# Altium PCB bottle.PcbDoc (part 1 of 3)
Units mil, origin at the board's own origin, x right, y up, seen from the top; angles counter-clockwise.
Board outline 2167.23 x 704.79 mil, 4 copper layers (Top Layer, GND, PWR, Bottom Layer), stack 23.756 mil thick; 195 components, 172 nets, 770 pads, 122 vias.
Unrouted connection lines stored in the file: 308.
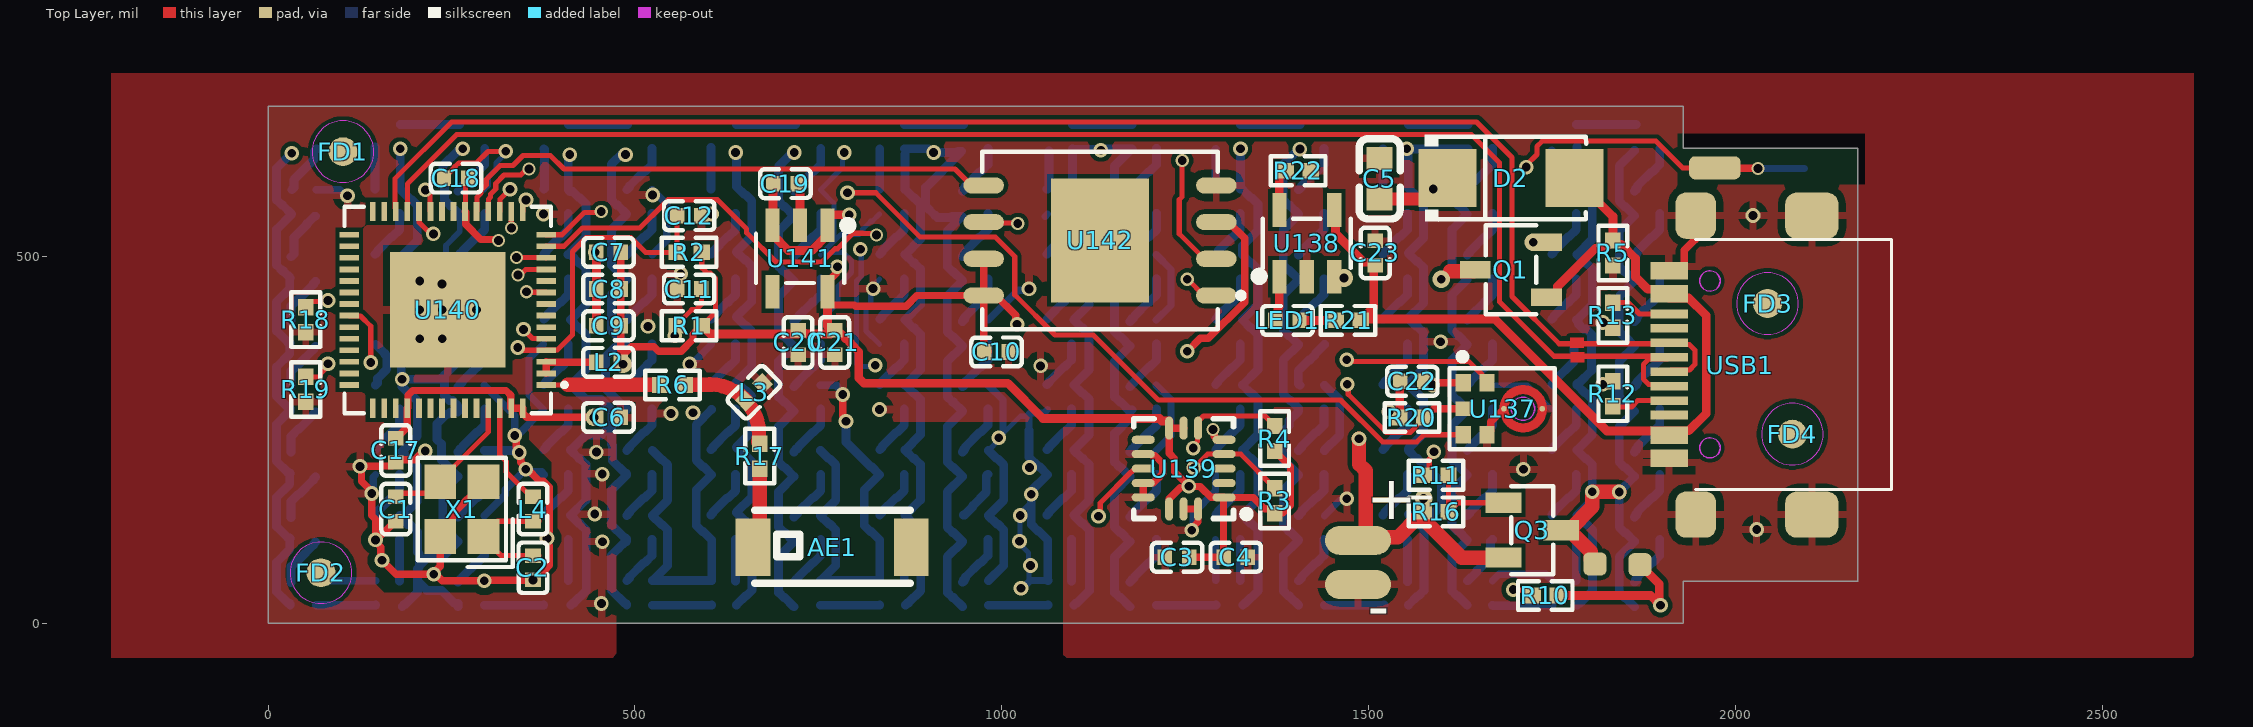
[diagram p0: Top Layer view]
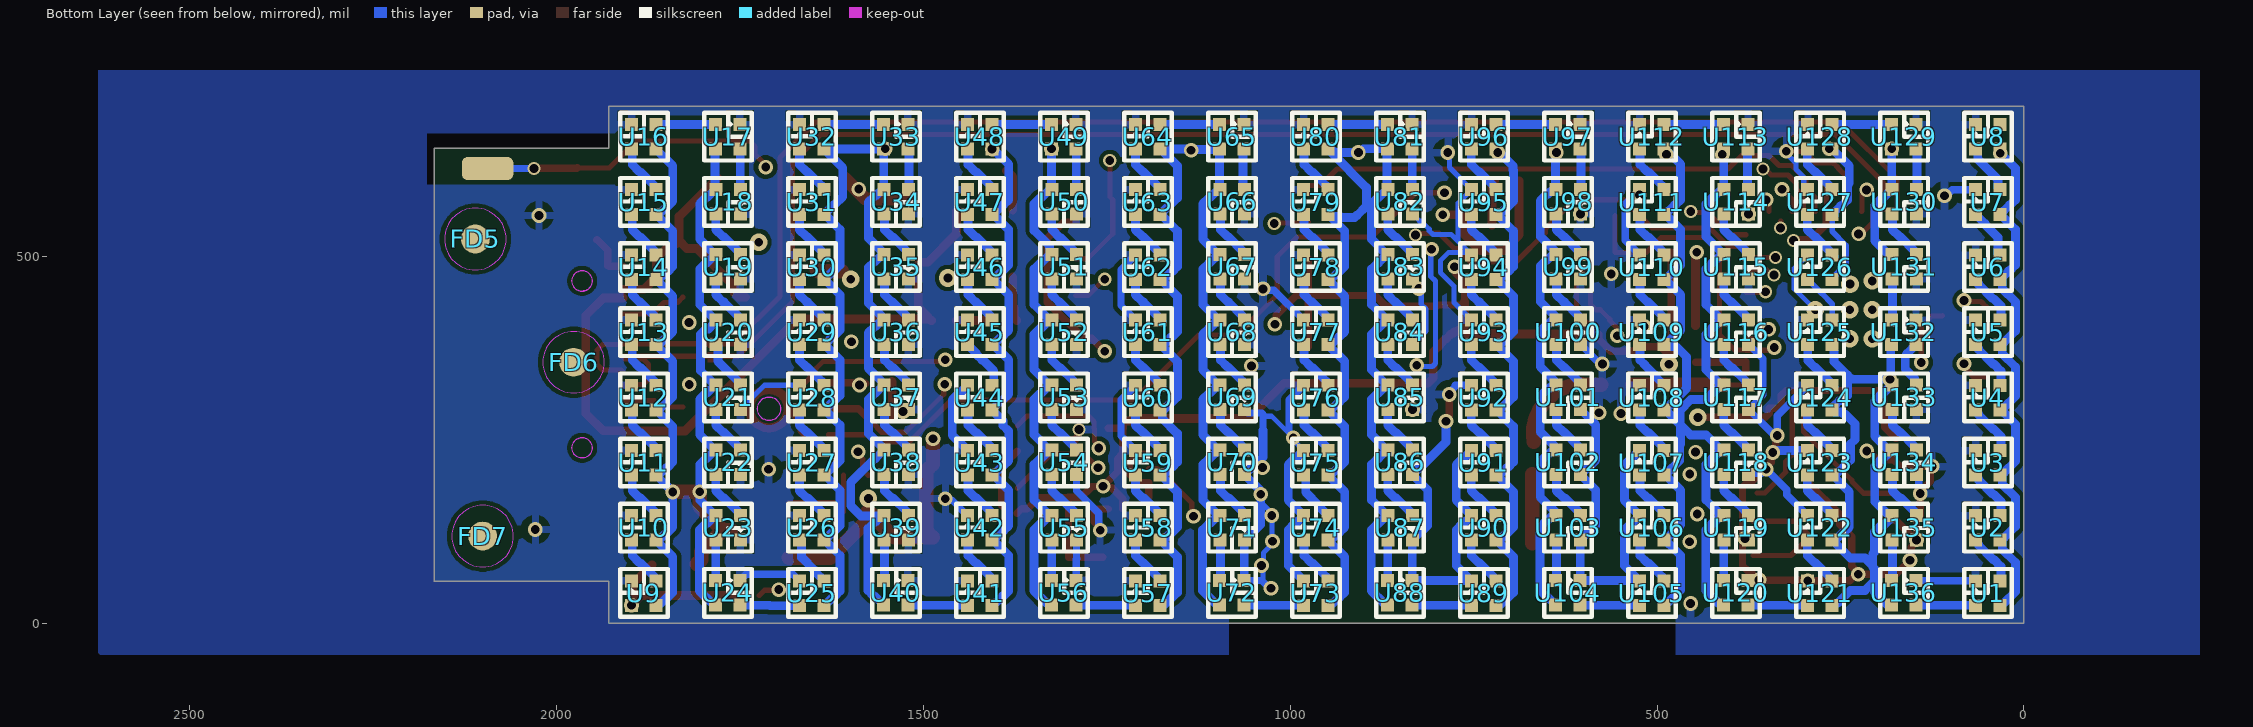
[diagram p1: Bottom Layer view, seen from below]
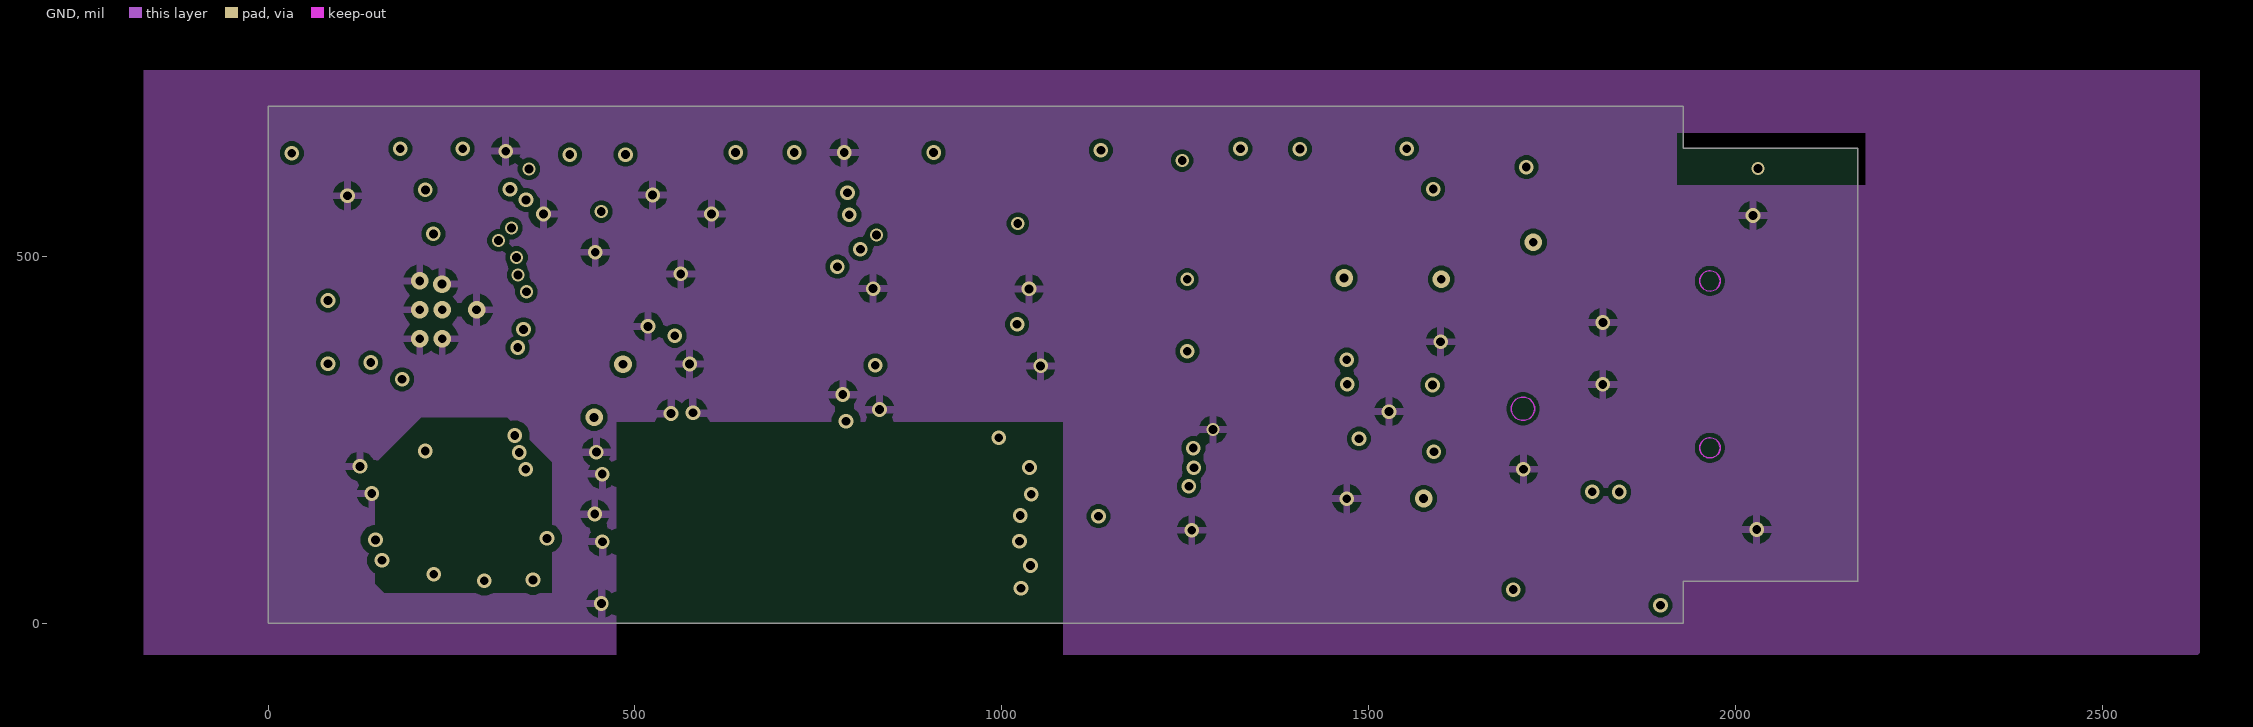
[diagram p2: GND]
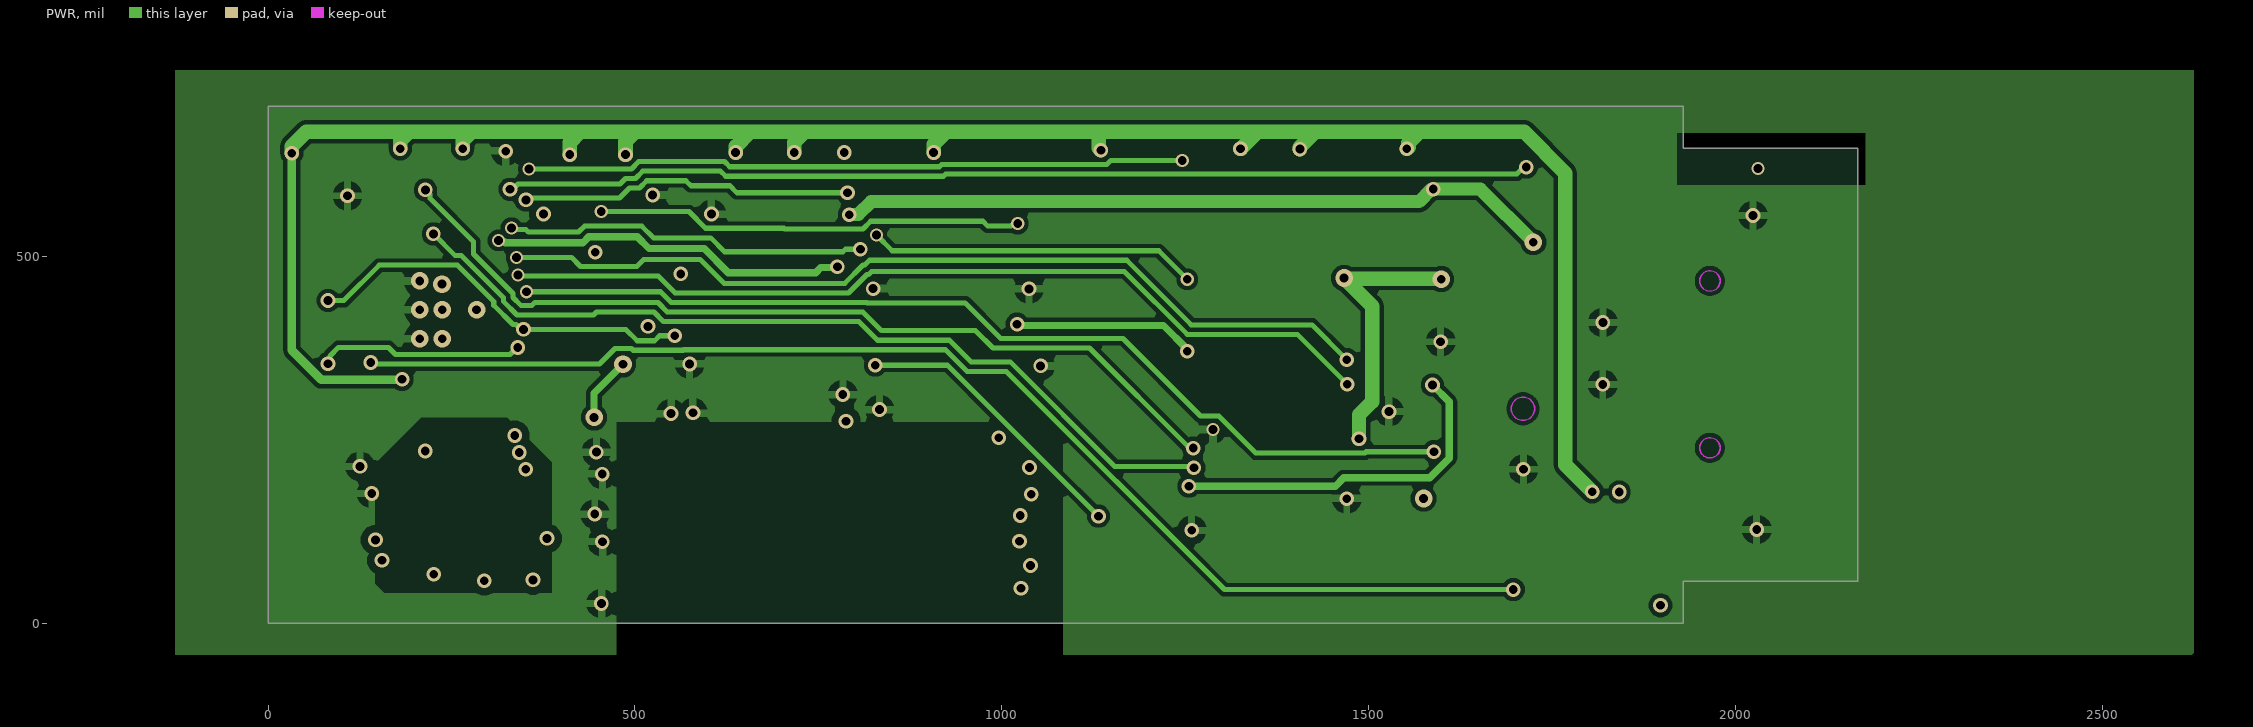
[diagram p3: PWR]

## Layer stack, top to bottom
Top Solder: solder mask 0.4, Solder Resist, Dk 3.5
Top Layer: signal copper 1.4
Dielectric 2: prepreg 2.8, PP-006, Dk 4.1
GND: signal copper 1.378
Dielectric 1: dielectric 12.6, FR-4, Dk 4.8
PWR: signal copper 1.378
Dielectric 3: prepreg 2.8, PP-006, Dk 4.1
Bottom Layer: signal copper 1.4
Bottom Solder: solder mask 0.4, Solder Resist, Dk 3.5

## Board outline
0,0 0,704.79 1929.2,704.79 1929.2,648 2167.23,648 2167.23,57.14 2167.2,57.12 1929.19,57.12 1929.19,0

## Design rules (kind name [scope] priority, off if disabled: settings)
Clearance [All] p1: gap=6 ignorepadtopadclearanceinfootprint=FALSE
ComponentClearance [All] p1: gap=2 collisioncheckmode=3 verticalgap=10 showdistances=FALSE
DiffPairsRouting [All] p1: maxlimit=10 minlimit=10 mostfreqgap=10 toplayer_minwidth=6 toplayer_maxwidth=15 toplayer_prefwidth=15 midlayer1_minwidth=6 midlayer1_maxwidth=15 midlayer1_prefwidth=15 midlayer2_minwidth=6 midlayer2_maxwidth=15 midlayer2_prefwidth=15 bottomlayer_minwidth=6 bottomlayer_maxwidth=15 bottomlayer_prefwidth=15 maxuncoupledlength=500
MatchedLengths [InDifferentialPairClass('All Differential Pairs')] p1: tolerance=39.37 checknetsindiffpair=FALSE checkdiffpairvsdiffpair=TRUE checkxsignals=TRUE checkothers=TRUE
MinimumSolderMaskSliver [All] p1: minsoldermaskwidth=2
PolygonConnect [All] p1: connectstyle=Relief reliefconductorwidth=10 reliefentries=4 polygonreliefangle="90 Angle" airgapwidth=10
RoutingVias [All] p1: holewidth=12 width=20 viastyle="Through Hole" minholewidth=12 minwidth=18 maxholewidth=30 maxwidth=50
SilkToSolderMaskClearance [IsPad] p1 off: minsilkscreentomaskgap=2 clearancetoexposedcopper=TRUE
SolderMaskExpansion [isvia] p1: expansion=4 istentingtop=TRUE
SupplyNets "Schematic Supply Nets" [InNet('VSYS')] p1: voltage=0.000
SupplyNets "Schematic Supply Nets_1" [InNet('VBAT')] p2: voltage=0.000
SupplyNets "Schematic Supply Nets_6" [InNet('GND')] p3: voltage=0.000
SupplyNets "Schematic Supply Nets_5" [InNet('+5V_2812')] p4: voltage=0.000
SupplyNets "Schematic Supply Nets_4" [InNet('3.3V')] p5: voltage=0.000
Width [All] p1: maxlimit=50 minlimit=6 preferedwidth=10
26 further rules are at their usual default settings.

## Classes and differential pairs
component class led_array: U1 U2 U3 U4 U5 U6 U7 U8 U9 U10 U11 U12 U13 U14 U15 U16 U17 U18 U19 U20 U21 U22 U23 U24 U25 U26 U27 U28 U29 U30 U31 U32 U33 U34 U35 U36 U37 U38 U39 U40 U41 U42 U43 U44 U45 U46 U47 U48 U49 U50 U51 U52 U53 U54 U55 U56 U57 U58 U59 U60 U61 U62 U63 U64 U65 U66 U67 U68 U69 U70 U71 U72 U73 U74 U75 U76 U77 U78 U79 U80 U81 U82 U83 U84 U85 U86 U87 U88 U89 U90 U91 U92 U93 U94 U95 U96 U97 U98 U99 U100 U101 U102 U103 U104 U105 U106 U107 U108 U109 U110 U111 U112 U113 U114 U115 U116 U117 U118 U119 U120 U121 U122 U123 U124 U125 U126 U127 U128 U129 U130 U131 U132 U133 U134 U135 U136
component class main: AE1 C1 C2 C3 C4 C5 C6 C7 C8 C9 C10 C11 C12 C17 C18 C19 C20 C21 C22 C23 D2 FD1 FD2 FD3 FD4 FD5 FD6 FD7 L2 L3 L4 LED1 Q1 Q3 R1 R2 R3 R4 R5 R6 R10 R11 R12 R13 R16 R17 R18 R19 R20 R21 R22 U137 U138 U139 U140 U141 U142 USB1 X1
differential pair UD: +UD_P -UD_N

## Components (designator, comment, footprint, x,y, rotation, side; value= is the part's Value field where it differs from the comment)
AE1 "ANT5520" ANT_5520 697.2,104 r0 top
C1 "15pF" C0402 173.97,155.82 r90 top
C2 "15pF" C0402 360.97,75.82 r270 top
C3 "10uF" C0402 1239.08,90.16 r0 top
C4 "100nF" C0402 1319,90.16 r180 top
C5 "47uF" c0603 1515.2,606 r90 top
C6 "100nF" C0402 463.97,280.82 r180 top
C7 "1uF" C0402 463.97,505.82 r0 top
C8 "10uF" C0402 463.97,455.82 r0 top
C9 "100nF" C0402 463.97,405.82 r0 top
C10 "100nF" C0402 993,370 r180 top
C11 "100nF" C0402 573.97,455.82 r0 top
C12 "1uF" C0402 573.97,555.82 r180 top
C17 "100nF" C0402 173.97,235.82 r90 top
C18 "100nF" C0402 256.2,607 r0 top
C19 "10uF" c0402 705.15,599.47 r180 top value=10UF
C20 "10uF" c0402 722.36,383 r90 top value=10UF
C21 "100nF" C0402 772.36,383 r90 top value=100NF
C22 "100nF" c0402 1559.74,330 r0 top
C23 "1uF" C0402 1509.2,505 r270 top
D2 "SS34_C9900020624" SMA_L4.3-W2.6-LS5.1-R-RD 1694.2,607 r0 top
FD1 "Fiducial" FIDUCIAL_1MM 102,643 r0 top
FD2 "Fiducial" FIDUCIAL_1MM 72,69 r0 top
FD3 "Fiducial" FIDUCIAL_1MM 2044,436 r0 top
FD4 "Fiducial" FIDUCIAL_1MM 2078,258 r0 top
FD5 "Fiducial" FIDUCIAL_1MM 2111,524 r180 bottom
FD6 "Fiducial" FIDUCIAL_1MM 1977,356 r180 bottom
FD7 "Fiducial" FIDUCIAL_1MM 2101,119 r180 bottom
L2 "2nH" c0402 463.97,355.82 r180 top
L3 "3nH" c0402 662.2,315 r225 top value=4.7nH
L4 "24nH" c0402 360.97,155.82 r270 top
LED1 "LED-0603_G" c0402 1389.43,413 r180 top
Q1 "AO3401A" SOT-23-3_L2.9-W1.6-P1.90-LS2.8-BR_1 1694.2,482 r0 top
Q3 "AO3401A" SOT-23-3_L2.9-W1.3-P1.90-LS2.4-BR 1723.2,127 r180 top
R1 "10k" r0402 573.97,405.82 r0 top
R2 "10k" r0402 573.97,505.82 r0 top
R3 "5.1k" r0402 1372,167 r270 top
R4 "5.1k" r0402 1372,252 r270 top
R5 "10k" r0402 1833.2,505 r90 top value=10kΩ
R6 "0r" R0402 551.2,325 r0 top value=0Ω
R10 "240r" R0402 1741,38 r0 top value=240Ω
R11 "22r" r0402 1592.16,202 r180 top
R12 "5.1k" r0402 1833.2,313 r270 top
R13 "5.1k" r0402 1833.2,420 r270 top
R16 "10k" r0402 1592.16,152 r0 top value=10kΩ
R17 "0r" R0402 670.2,228 r270 top value=0Ω
R18 "0r" R0402 51.2,414 r90 top value=0Ω
R19 "0r" R0402 51.2,319.04 r90 top value=0Ω
R20 "100kΩ" r0402 1559.2,280.6 r180 top
R21 "1kΩ" r0402 1472.2,413.04 r0 top
R22 "3K" R0402 1404.2,617 r180 top
U1 "XL-1010RGBC-2812B" LED-SMD_4P-L1.0-W1.0-TL_XL-1010RGBC-WS2812B 32.21,58.07 r270 bottom
U2 "XL-1010RGBC-2812B" LED-SMD_4P-L1.0-W1.0-TL_XL-1010RGBC-WS2812B 32.21,146.92 r270 bottom
U3 "XL-1010RGBC-2812B" LED-SMD_4P-L1.0-W1.0-TL_XL-1010RGBC-WS2812B 32.21,235.76 r270 bottom
U4 "XL-1010RGBC-2812B" LED-SMD_4P-L1.0-W1.0-TL_XL-1010RGBC-WS2812B 32.21,324.61 r270 bottom
U5 "XL-1010RGBC-2812B" LED-SMD_4P-L1.0-W1.0-TL_XL-1010RGBC-WS2812B 32.21,413.46 r270 bottom
U6 "XL-1010RGBC-2812B" LED-SMD_4P-L1.0-W1.0-TL_XL-1010RGBC-WS2812B 32.21,502.3 r270 bottom
U7 "XL-1010RGBC-2812B" LED-SMD_4P-L1.0-W1.0-TL_XL-1010RGBC-WS2812B 32.21,591.15 r270 bottom
U8 "XL-1010RGBC-2812B" LED-SMD_4P-L1.0-W1.0-TL_XL-1010RGBC-WS2812B 32.21,680 r270 bottom
U9 "XL-1010RGBC-2812B" LED-SMD_4P-L1.0-W1.0-TL_XL-1010RGBC-WS2812B 1864.6,58.07 r270 bottom
U10 "XL-1010RGBC-2812B" LED-SMD_4P-L1.0-W1.0-TL_XL-1010RGBC-WS2812B 1864.6,146.92 r270 bottom
U11 "XL-1010RGBC-2812B" LED-SMD_4P-L1.0-W1.0-TL_XL-1010RGBC-WS2812B 1864.6,235.77 r270 bottom
U12 "XL-1010RGBC-2812B" LED-SMD_4P-L1.0-W1.0-TL_XL-1010RGBC-WS2812B 1864.6,324.61 r270 bottom
U13 "XL-1010RGBC-2812B" LED-SMD_4P-L1.0-W1.0-TL_XL-1010RGBC-WS2812B 1864.6,413.46 r270 bottom
U14 "XL-1010RGBC-2812B" LED-SMD_4P-L1.0-W1.0-TL_XL-1010RGBC-WS2812B 1864.6,502.31 r270 bottom
U15 "XL-1010RGBC-2812B" LED-SMD_4P-L1.0-W1.0-TL_XL-1010RGBC-WS2812B 1864.6,591.15 r270 bottom
U16 "XL-1010RGBC-2812B" LED-SMD_4P-L1.0-W1.0-TL_XL-1010RGBC-WS2812B 1864.6,680 r270 bottom
U17 "XL-1010RGBC-2812B" LED-SMD_4P-L1.0-W1.0-TL_XL-1010RGBC-WS2812B 1750.07,646.93 r0 bottom
U18 "XL-1010RGBC-2812B" LED-SMD_4P-L1.0-W1.0-TL_XL-1010RGBC-WS2812B 1783.14,558.08 r90 bottom
U19 "XL-1010RGBC-2812B" LED-SMD_4P-L1.0-W1.0-TL_XL-1010RGBC-WS2812B 1783.14,469.23 r90 bottom
U20 "XL-1010RGBC-2812B" LED-SMD_4P-L1.0-W1.0-TL_XL-1010RGBC-WS2812B 1783.14,380.39 r90 bottom
U21 "XL-1010RGBC-2812B" LED-SMD_4P-L1.0-W1.0-TL_XL-1010RGBC-WS2812B 1783.14,291.54 r90 bottom
U22 "XL-1010RGBC-2812B" LED-SMD_4P-L1.0-W1.0-TL_XL-1010RGBC-WS2812B 1783.14,202.69 r90 bottom
U23 "XL-1010RGBC-2812B" LED-SMD_4P-L1.0-W1.0-TL_XL-1010RGBC-WS2812B 1783.14,113.85 r90 bottom
U24 "XL-1010RGBC-2812B" LED-SMD_4P-L1.0-W1.0-TL_XL-1010RGBC-WS2812B 1750.07,25 r0 bottom
U25 "XL-1010RGBC-2812B" LED-SMD_4P-L1.0-W1.0-TL_XL-1010RGBC-WS2812B 1635.54,58.07 r270 bottom
U26 "XL-1010RGBC-2812B" LED-SMD_4P-L1.0-W1.0-TL_XL-1010RGBC-WS2812B 1635.54,146.92 r270 bottom
U27 "XL-1010RGBC-2812B" LED-SMD_4P-L1.0-W1.0-TL_XL-1010RGBC-WS2812B 1635.54,235.77 r270 bottom
U28 "XL-1010RGBC-2812B" LED-SMD_4P-L1.0-W1.0-TL_XL-1010RGBC-WS2812B 1635.54,324.61 r270 bottom
U29 "XL-1010RGBC-2812B" LED-SMD_4P-L1.0-W1.0-TL_XL-1010RGBC-WS2812B 1635.54,413.46 r270 bottom
U30 "XL-1010RGBC-2812B" LED-SMD_4P-L1.0-W1.0-TL_XL-1010RGBC-WS2812B 1635.54,502.31 r270 bottom
U31 "XL-1010RGBC-2812B" LED-SMD_4P-L1.0-W1.0-TL_XL-1010RGBC-WS2812B 1635.54,591.15 r270 bottom
U32 "XL-1010RGBC-2812B" LED-SMD_4P-L1.0-W1.0-TL_XL-1010RGBC-WS2812B 1635.55,680 r270 bottom
U33 "XL-1010RGBC-2812B" LED-SMD_4P-L1.0-W1.0-TL_XL-1010RGBC-WS2812B 1521.02,646.93 r0 bottom
U34 "XL-1010RGBC-2812B" LED-SMD_4P-L1.0-W1.0-TL_XL-1010RGBC-WS2812B 1554.09,558.08 r90 bottom
U35 "XL-1010RGBC-2812B" LED-SMD_4P-L1.0-W1.0-TL_XL-1010RGBC-WS2812B 1554.09,469.23 r90 bottom
U36 "XL-1010RGBC-2812B" LED-SMD_4P-L1.0-W1.0-TL_XL-1010RGBC-WS2812B 1554.09,380.39 r90 bottom
U37 "XL-1010RGBC-2812B" LED-SMD_4P-L1.0-W1.0-TL_XL-1010RGBC-WS2812B 1554.09,291.54 r90 bottom
U38 "XL-1010RGBC-2812B" LED-SMD_4P-L1.0-W1.0-TL_XL-1010RGBC-WS2812B 1554.09,202.69 r90 bottom
U39 "XL-1010RGBC-2812B" LED-SMD_4P-L1.0-W1.0-TL_XL-1010RGBC-WS2812B 1554.09,113.85 r90 bottom
U40 "XL-1010RGBC-2812B" LED-SMD_4P-L1.0-W1.0-TL_XL-1010RGBC-WS2812B 1521.02,25 r0 bottom
U41 "XL-1010RGBC-2812B" LED-SMD_4P-L1.0-W1.0-TL_XL-1010RGBC-WS2812B 1406.49,58.07 r270 bottom
U42 "XL-1010RGBC-2812B" LED-SMD_4P-L1.0-W1.0-TL_XL-1010RGBC-WS2812B 1406.49,146.92 r270 bottom
U43 "XL-1010RGBC-2812B" LED-SMD_4P-L1.0-W1.0-TL_XL-1010RGBC-WS2812B 1406.49,235.77 r270 bottom
U44 "XL-1010RGBC-2812B" LED-SMD_4P-L1.0-W1.0-TL_XL-1010RGBC-WS2812B 1406.49,324.61 r270 bottom
U45 "XL-1010RGBC-2812B" LED-SMD_4P-L1.0-W1.0-TL_XL-1010RGBC-WS2812B 1406.49,413.46 r270 bottom
U46 "XL-1010RGBC-2812B" LED-SMD_4P-L1.0-W1.0-TL_XL-1010RGBC-WS2812B 1406.49,502.31 r270 bottom
U47 "XL-1010RGBC-2812B" LED-SMD_4P-L1.0-W1.0-TL_XL-1010RGBC-WS2812B 1406.49,591.15 r270 bottom
U48 "XL-1010RGBC-2812B" LED-SMD_4P-L1.0-W1.0-TL_XL-1010RGBC-WS2812B 1406.49,680 r270 bottom
U49 "XL-1010RGBC-2812B" LED-SMD_4P-L1.0-W1.0-TL_XL-1010RGBC-WS2812B 1291.96,646.93 r0 bottom
U50 "XL-1010RGBC-2812B" LED-SMD_4P-L1.0-W1.0-TL_XL-1010RGBC-WS2812B 1325.03,558.08 r90 bottom
U51 "XL-1010RGBC-2812B" LED-SMD_4P-L1.0-W1.0-TL_XL-1010RGBC-WS2812B 1325.03,469.23 r90 bottom
U52 "XL-1010RGBC-2812B" LED-SMD_4P-L1.0-W1.0-TL_XL-1010RGBC-WS2812B 1325.03,380.39 r90 bottom
U53 "XL-1010RGBC-2812B" LED-SMD_4P-L1.0-W1.0-TL_XL-1010RGBC-WS2812B 1325.03,291.54 r90 bottom
U54 "XL-1010RGBC-2812B" LED-SMD_4P-L1.0-W1.0-TL_XL-1010RGBC-WS2812B 1325.03,202.69 r90 bottom
U55 "XL-1010RGBC-2812B" LED-SMD_4P-L1.0-W1.0-TL_XL-1010RGBC-WS2812B 1325.03,113.85 r90 bottom
U56 "XL-1010RGBC-2812B" LED-SMD_4P-L1.0-W1.0-TL_XL-1010RGBC-WS2812B 1291.96,25 r0 bottom
U57 "XL-1010RGBC-2812B" LED-SMD_4P-L1.0-W1.0-TL_XL-1010RGBC-WS2812B 1177.43,58.07 r270 bottom
U58 "XL-1010RGBC-2812B" LED-SMD_4P-L1.0-W1.0-TL_XL-1010RGBC-WS2812B 1177.43,146.92 r270 bottom
U59 "XL-1010RGBC-2812B" LED-SMD_4P-L1.0-W1.0-TL_XL-1010RGBC-WS2812B 1177.43,235.77 r270 bottom
U60 "XL-1010RGBC-2812B" LED-SMD_4P-L1.0-W1.0-TL_XL-1010RGBC-WS2812B 1177.43,324.61 r270 bottom
U61 "XL-1010RGBC-2812B" LED-SMD_4P-L1.0-W1.0-TL_XL-1010RGBC-WS2812B 1177.43,413.46 r270 bottom
U62 "XL-1010RGBC-2812B" LED-SMD_4P-L1.0-W1.0-TL_XL-1010RGBC-WS2812B 1177.43,502.31 r270 bottom
U63 "XL-1010RGBC-2812B" LED-SMD_4P-L1.0-W1.0-TL_XL-1010RGBC-WS2812B 1177.43,591.15 r270 bottom
U64 "XL-1010RGBC-2812B" LED-SMD_4P-L1.0-W1.0-TL_XL-1010RGBC-WS2812B 1177.43,680 r270 bottom
U65 "XL-1010RGBC-2812B" LED-SMD_4P-L1.0-W1.0-TL_XL-1010RGBC-WS2812B 1062.9,646.93 r0 bottom
U66 "XL-1010RGBC-2812B" LED-SMD_4P-L1.0-W1.0-TL_XL-1010RGBC-WS2812B 1095.97,558.08 r90 bottom
U67 "XL-1010RGBC-2812B" LED-SMD_4P-L1.0-W1.0-TL_XL-1010RGBC-WS2812B 1095.97,469.23 r90 bottom
U68 "XL-1010RGBC-2812B" LED-SMD_4P-L1.0-W1.0-TL_XL-1010RGBC-WS2812B 1095.97,380.39 r90 bottom
U69 "XL-1010RGBC-2812B" LED-SMD_4P-L1.0-W1.0-TL_XL-1010RGBC-WS2812B 1095.97,291.54 r90 bottom
U70 "XL-1010RGBC-2812B" LED-SMD_4P-L1.0-W1.0-TL_XL-1010RGBC-WS2812B 1095.97,202.69 r90 bottom
U71 "XL-1010RGBC-2812B" LED-SMD_4P-L1.0-W1.0-TL_XL-1010RGBC-WS2812B 1095.97,113.85 r90 bottom
U72 "XL-1010RGBC-2812B" LED-SMD_4P-L1.0-W1.0-TL_XL-1010RGBC-WS2812B 1062.9,25 r0 bottom
U73 "XL-1010RGBC-2812B" LED-SMD_4P-L1.0-W1.0-TL_XL-1010RGBC-WS2812B 948.37,58.07 r270 bottom
U74 "XL-1010RGBC-2812B" LED-SMD_4P-L1.0-W1.0-TL_XL-1010RGBC-WS2812B 948.37,146.92 r270 bottom
U75 "XL-1010RGBC-2812B" LED-SMD_4P-L1.0-W1.0-TL_XL-1010RGBC-WS2812B 948.37,235.77 r270 bottom
U76 "XL-1010RGBC-2812B" LED-SMD_4P-L1.0-W1.0-TL_XL-1010RGBC-WS2812B 948.37,324.61 r270 bottom
U77 "XL-1010RGBC-2812B" LED-SMD_4P-L1.0-W1.0-TL_XL-1010RGBC-WS2812B 948.37,413.46 r270 bottom
U78 "XL-1010RGBC-2812B" LED-SMD_4P-L1.0-W1.0-TL_XL-1010RGBC-WS2812B 948.37,502.31 r270 bottom
U79 "XL-1010RGBC-2812B" LED-SMD_4P-L1.0-W1.0-TL_XL-1010RGBC-WS2812B 948.37,591.15 r270 bottom
U80 "XL-1010RGBC-2812B" LED-SMD_4P-L1.0-W1.0-TL_XL-1010RGBC-WS2812B 948.37,680 r270 bottom
U81 "XL-1010RGBC-2812B" LED-SMD_4P-L1.0-W1.0-TL_XL-1010RGBC-WS2812B 833.84,646.93 r0 bottom
U82 "XL-1010RGBC-2812B" LED-SMD_4P-L1.0-W1.0-TL_XL-1010RGBC-WS2812B 866.91,558.08 r90 bottom
U83 "XL-1010RGBC-2812B" LED-SMD_4P-L1.0-W1.0-TL_XL-1010RGBC-WS2812B 866.91,469.23 r90 bottom
U84 "XL-1010RGBC-2812B" LED-SMD_4P-L1.0-W1.0-TL_XL-1010RGBC-WS2812B 866.91,380.39 r90 bottom
U85 "XL-1010RGBC-2812B" LED-SMD_4P-L1.0-W1.0-TL_XL-1010RGBC-WS2812B 866.91,291.54 r90 bottom
U86 "XL-1010RGBC-2812B" LED-SMD_4P-L1.0-W1.0-TL_XL-1010RGBC-WS2812B 866.91,202.69 r90 bottom
U87 "XL-1010RGBC-2812B" LED-SMD_4P-L1.0-W1.0-TL_XL-1010RGBC-WS2812B 866.91,113.85 r90 bottom
U88 "XL-1010RGBC-2812B" LED-SMD_4P-L1.0-W1.0-TL_XL-1010RGBC-WS2812B 833.84,25 r0 bottom
U89 "XL-1010RGBC-2812B" LED-SMD_4P-L1.0-W1.0-TL_XL-1010RGBC-WS2812B 719.31,58.07 r270 bottom
U90 "XL-1010RGBC-2812B" LED-SMD_4P-L1.0-W1.0-TL_XL-1010RGBC-WS2812B 719.31,146.92 r270 bottom
U91 "XL-1010RGBC-2812B" LED-SMD_4P-L1.0-W1.0-TL_XL-1010RGBC-WS2812B 719.31,235.77 r270 bottom
U92 "XL-1010RGBC-2812B" LED-SMD_4P-L1.0-W1.0-TL_XL-1010RGBC-WS2812B 719.31,324.61 r270 bottom
U93 "XL-1010RGBC-2812B" LED-SMD_4P-L1.0-W1.0-TL_XL-1010RGBC-WS2812B 719.31,413.46 r270 bottom
U94 "XL-1010RGBC-2812B" LED-SMD_4P-L1.0-W1.0-TL_XL-1010RGBC-WS2812B 719.31,502.31 r270 bottom
U95 "XL-1010RGBC-2812B" LED-SMD_4P-L1.0-W1.0-TL_XL-1010RGBC-WS2812B 719.31,591.15 r270 bottom
U96 "XL-1010RGBC-2812B" LED-SMD_4P-L1.0-W1.0-TL_XL-1010RGBC-WS2812B 719.32,680 r270 bottom
U97 "XL-1010RGBC-2812B" LED-SMD_4P-L1.0-W1.0-TL_XL-1010RGBC-WS2812B 604.79,646.93 r0 bottom
U98 "XL-1010RGBC-2812B" LED-SMD_4P-L1.0-W1.0-TL_XL-1010RGBC-WS2812B 637.86,558.08 r90 bottom
U99 "XL-1010RGBC-2812B" LED-SMD_4P-L1.0-W1.0-TL_XL-1010RGBC-WS2812B 637.86,469.23 r90 bottom
U100 "XL-1010RGBC-2812B" LED-SMD_4P-L1.0-W1.0-TL_XL-1010RGBC-WS2812B 637.86,380.39 r90 bottom
U101 "XL-1010RGBC-2812B" LED-SMD_4P-L1.0-W1.0-TL_XL-1010RGBC-WS2812B 637.86,291.54 r90 bottom
U102 "XL-1010RGBC-2812B" LED-SMD_4P-L1.0-W1.0-TL_XL-1010RGBC-WS2812B 637.86,202.69 r90 bottom
U103 "XL-1010RGBC-2812B" LED-SMD_4P-L1.0-W1.0-TL_XL-1010RGBC-WS2812B 637.86,113.85 r90 bottom
U104 "XL-1010RGBC-2812B" LED-SMD_4P-L1.0-W1.0-TL_XL-1010RGBC-WS2812B 604.79,25 r0 bottom
U105 "XL-1010RGBC-2812B" LED-SMD_4P-L1.0-W1.0-TL_XL-1010RGBC-WS2812B 490.26,58.07 r270 bottom
U106 "XL-1010RGBC-2812B" LED-SMD_4P-L1.0-W1.0-TL_XL-1010RGBC-WS2812B 490.26,146.92 r270 bottom
U107 "XL-1010RGBC-2812B" LED-SMD_4P-L1.0-W1.0-TL_XL-1010RGBC-WS2812B 490.26,235.77 r270 bottom
U108 "XL-1010RGBC-2812B" LED-SMD_4P-L1.0-W1.0-TL_XL-1010RGBC-WS2812B 490.26,324.61 r270 bottom
U109 "XL-1010RGBC-2812B" LED-SMD_4P-L1.0-W1.0-TL_XL-1010RGBC-WS2812B 490.26,413.46 r270 bottom
U110 "XL-1010RGBC-2812B" LED-SMD_4P-L1.0-W1.0-TL_XL-1010RGBC-WS2812B 490.26,502.31 r270 bottom
U111 "XL-1010RGBC-2812B" LED-SMD_4P-L1.0-W1.0-TL_XL-1010RGBC-WS2812B 490.26,591.15 r270 bottom
U112 "XL-1010RGBC-2812B" LED-SMD_4P-L1.0-W1.0-TL_XL-1010RGBC-WS2812B 490.26,680 r270 bottom
U113 "XL-1010RGBC-2812B" LED-SMD_4P-L1.0-W1.0-TL_XL-1010RGBC-WS2812B 375.73,646.93 r0 bottom
U114 "XL-1010RGBC-2812B" LED-SMD_4P-L1.0-W1.0-TL_XL-1010RGBC-WS2812B 408.8,558.08 r90 bottom
U115 "XL-1010RGBC-2812B" LED-SMD_4P-L1.0-W1.0-TL_XL-1010RGBC-WS2812B 408.8,469.23 r90 bottom
U116 "XL-1010RGBC-2812B" LED-SMD_4P-L1.0-W1.0-TL_XL-1010RGBC-WS2812B 408.8,380.39 r90 bottom
U117 "XL-1010RGBC-2812B" LED-SMD_4P-L1.0-W1.0-TL_XL-1010RGBC-WS2812B 408.8,291.54 r90 bottom
U118 "XL-1010RGBC-2812B" LED-SMD_4P-L1.0-W1.0-TL_XL-1010RGBC-WS2812B 408.8,202.69 r90 bottom
U119 "XL-1010RGBC-2812B" LED-SMD_4P-L1.0-W1.0-TL_XL-1010RGBC-WS2812B 408.8,113.85 r90 bottom
U120 "XL-1010RGBC-2812B" LED-SMD_4P-L1.0-W1.0-TL_XL-1010RGBC-WS2812B 375.73,25 r0 bottom
U121 "XL-1010RGBC-2812B" LED-SMD_4P-L1.0-W1.0-TL_XL-1010RGBC-WS2812B 261.2,58.07 r270 bottom
U122 "XL-1010RGBC-2812B" LED-SMD_4P-L1.0-W1.0-TL_XL-1010RGBC-WS2812B 261.2,146.92 r270 bottom
U123 "XL-1010RGBC-2812B" LED-SMD_4P-L1.0-W1.0-TL_XL-1010RGBC-WS2812B 261.2,235.77 r270 bottom
U124 "XL-1010RGBC-2812B" LED-SMD_4P-L1.0-W1.0-TL_XL-1010RGBC-WS2812B 261.2,324.61 r270 bottom
U125 "XL-1010RGBC-2812B" LED-SMD_4P-L1.0-W1.0-TL_XL-1010RGBC-WS2812B 261.2,413.46 r270 bottom
U126 "XL-1010RGBC-2812B" LED-SMD_4P-L1.0-W1.0-TL_XL-1010RGBC-WS2812B 261.2,502.31 r270 bottom
U127 "XL-1010RGBC-2812B" LED-SMD_4P-L1.0-W1.0-TL_XL-1010RGBC-WS2812B 261.2,591.15 r270 bottom
U128 "XL-1010RGBC-2812B" LED-SMD_4P-L1.0-W1.0-TL_XL-1010RGBC-WS2812B 261.2,680 r270 bottom
U129 "XL-1010RGBC-2812B" LED-SMD_4P-L1.0-W1.0-TL_XL-1010RGBC-WS2812B 146.67,646.93 r0 bottom
U130 "XL-1010RGBC-2812B" LED-SMD_4P-L1.0-W1.0-TL_XL-1010RGBC-WS2812B 179.74,558.08 r90 bottom
U131 "XL-1010RGBC-2812B" LED-SMD_4P-L1.0-W1.0-TL_XL-1010RGBC-WS2812B 179.74,469.23 r90 bottom
U132 "XL-1010RGBC-2812B" LED-SMD_4P-L1.0-W1.0-TL_XL-1010RGBC-WS2812B 146.67,380.39 r0 bottom
U133 "XL-1010RGBC-2812B" LED-SMD_4P-L1.0-W1.0-TL_XL-1010RGBC-WS2812B 179.74,291.54 r90 bottom
U134 "XL-1010RGBC-2812B" LED-SMD_4P-L1.0-W1.0-TL_XL-1010RGBC-WS2812B 179.74,202.69 r90 bottom
U135 "XL-1010RGBC-2812B" LED-SMD_4P-L1.0-W1.0-TL_XL-1010RGBC-WS2812B 179.74,113.85 r90 bottom
U136 "XL-1010RGBC-2812B" LED-SMD_4P-L1.0-W1.0-TL_XL-1010RGBC-WS2812B 146.67,25 r0 bottom
U137 "MSM261S3526Z0CM" MIC-SMD_6P-L3.5-W2.7-P0.90-TR 1683.05,292.57 r90 top
U138 "LTC4054" SOT-23-5_L3.0-W1.7-P0.95-LS2.8-BL 1415.89,518 r0 top
U139 "LIS3DHTR" LGA-16_L3.0-W3.0-P0.50-TL 1248,211 r180 top
U140 "ESP32-S3R8" QFN-56_L7.0-W7.0-P0.40-TL-EP4.0 244.81,427.44 r180 top
U141 "RT9013-33GB" SOT-23-5_L3.0-W1.7-P0.95-LS2.8-BL 725.15,497.47 r180 top
U142 "W25Q256JVEIQ" WSON-8_L8.0-W6.10-P1.27-BL-EP-MINI 1134,522 r90 top
USB1 "KH-TYPEC-16P" USB-TYPEC-16P-SMD 2058.2,353 r90 top
X1 "40MHz" CRYSTAL-SMD_4P-L2.5-W2.0-BL 263.97,155.82 r90 top

## Footprints (in the part's own frame and the unit in brackets; to place one, negate y for a bottom-side part, rotate by r counter-clockwise, add the part's x,y. Pads: shape width x height; smd on the part's side, far side on the other; paste and mask are expansions set on the pad)
ANT_5520 [mm]
  rect 1.2x2 smd: 1(-0.92,-0.01) 2(4.56,-0.01)
  silkscreen extent -0.87,-1.25 4.52,1.27
C0402 [mm]
  rect 0.5x0.54 smd paste+0.051: 1(-0.42,0) 2(0.42,0)
  silkscreen extent -0.87,-0.5 0.87,0.5
c0402 [mm]
  rect 0.5x0.54 smd paste+0.051: 1(-0.42,0) 2(0.42,0)
  silkscreen extent -0.87,-0.5 0.87,0.5
c0603 [mm]
  rect 0.8x0.9 smd paste+0.051: 1(-0.7,0) 2(0.7,0)
  silkscreen extent -1.39,-0.71 1.39,0.71
CRYSTAL-SMD_4P-L2.5-W2.0-BL [mm]
  rect 1.2x1.1 smd paste+0.051: 1(-0.95,-0.75) 2(0.95,-0.75) 3(0.95,0.75) 4(-0.95,0.75)
  silkscreen extent -2.01,-1.76 1.78,1.53
FIDUCIAL_1MM [mm] "FIDUCIAL_1MM"
  rrect100% 1x1 smd paste-1 mask+0: 1(0,0)
  Top Layer keep-out region: -1.063,0 -1.063,-0.105 -1.023,-0.31 -0.942,-0.504 -0.826,-0.678 -0.678,-0.826 -0.504,-0.942 -0.31,-1.023 -0.105,-1.063 0,-1.063 0.105,-1.063 0.31,-1.023 0.504,-0.942 0.678,-0.826 0.826,-0.678 0.942,-0.504 1.023,-0.31 1.063,-0.105 1.063,0 1.063,0.105 1.023,0.31 0.942,0.504 0.826,0.678 0.678,0.826 0.504,0.942 0.31,1.023 0.105,1.063 0,1.063 -0.105,1.063 -0.31,1.023 -0.504,0.942 -0.678,0.826 -0.826,0.678 -0.942,0.504 -1.023,0.31 -1.063,0.105 -1.063,0
LED-SMD_4P-L1.0-W1.0-TL_XL-1010RGBC-WS2812B [mm]
  rect 0.45x0.45 smd: 1(0,0) 2(0.85,0) 3(0,-0.85) 4(0.85,-0.85)
  silkscreen extent -0.41,-1.25 1.25,0.41
LGA-16_L3.0-W3.0-P0.50-TL [mil]
  oval 31.5x11 smd: 1(-55.1,39.4) 2(-55.1,19.7) 3(-55.1,0) 4(-55.1,-19.7) 5(-55.1,-39.3) 9(55.1,-39.3) 10(55.1,-19.7) 11(55.1,0) 12(55.1,19.7) 13(55.1,39.4)
  oval 11x31.5 smd: 6(-19.7,-55.1) 7(0,-55.1) 8(19.7,-55.1) 14(19.7,55.1) 15(0,55.1) 16(-19.7,55.1)
  silkscreen extent -91,-68 68,68
MIC-SMD_6P-L3.5-W2.7-P0.90-TR [mm]
  rect 0.6x0.52 smd paste-100 mask+0.05: 1(0.9,1.368) 2(0.9,0.545) 4(-0.9,0.545) 5(-0.9,1.368)
  round 0.193 smd: 3(0,-0.042) 3(0,-1.368)
  rect 0.5x0.52 smd paste-100 mask+0.05: 6(0,1.368)
  Top Layer region: 167 vertices and 0 holes, not listed, extent -0.813,-0.854 0.813,0.109
  Top Layer region: 169 vertices and 0 holes, not listed, extent -0.813,-1.521 0.813,-0.555
  Keep-Out Layer circle w0.003: c0,-0.7 r0.4
  Keep-Out Layer region: -0.4,-0.7 -0.4,-0.62 -0.339,-0.473 -0.227,-0.361 -0.08,-0.3 0.08,-0.3 0.227,-0.361 0.339,-0.473 0.4,-0.62 0.4,-0.7 0.4,-0.78 0.339,-0.927 0.227,-1.039 0.08,-1.1 -0.08,-1.1 -0.227,-1.039 -0.339,-0.927 -0.4,-0.78 -0.4,-0.7 -0.4,-0.7
  Keep-Out Layer region: -0.4,-0.7 -0.4,-0.62 -0.339,-0.473 -0.227,-0.361 -0.08,-0.3 0.08,-0.3 0.227,-0.361 0.339,-0.473 0.4,-0.62 0.4,-0.7 0.4,-0.78 0.339,-0.927 0.227,-1.039 0.08,-1.1 -0.08,-1.1 -0.227,-1.039 -0.339,-0.927 -0.4,-0.78 -0.4,-0.7 -0.4,-0.7
  silkscreen extent -1.4,-1.8 1.92,1.85
QFN-56_L7.0-W7.0-P0.40-TL-EP4.0 [mm]
  rect 0.665x0.2 smd paste-100 mask+0.051: 1(-3.408,2.6) 2(-3.408,2.2) 3(-3.408,1.8) 4(-3.408,1.4) 5(-3.408,1) 6(-3.408,0.6) 7(-3.408,0.2) 8(-3.408,-0.2) 9(-3.408,-0.6) 10(-3.408,-1) 11(-3.408,-1.4) 12(-3.408,-1.8) 13(-3.408,-2.2) 14(-3.408,-2.6) 29(3.408,-2.6) 30(3.408,-2.2) 31(3.408,-1.8) 32(3.408,-1.4) 33(3.408,-1) 34(3.408,-0.6) 35(3.408,-0.2) 36(3.408,0.2) 37(3.408,0.6) 38(3.408,1) 39(3.408,1.4) 40(3.408,1.8) 41(3.408,2.2) 42(3.408,2.6)
  rect 0.2x0.665 smd paste-100 mask+0.051: 15(-2.6,-3.407) 16(-2.2,-3.407) 17(-1.8,-3.407) 18(-1.4,-3.407) 19(-1,-3.407) 20(-0.6,-3.407) 21(-0.2,-3.407) 22(0.2,-3.407) 23(0.6,-3.407) 24(1,-3.407) 25(1.4,-3.407) 26(1.8,-3.407) 27(2.2,-3.407) 28(2.6,-3.407) 43(2.6,3.408) 44(2.2,3.408) 45(1.8,3.408) 46(1.4,3.408) 47(1,3.408) 48(0.6,3.408) 49(0.2,3.408) 50(-0.2,3.408) 51(-0.6,3.408) 52(-1,3.408) 53(-1.4,3.408) 54(-1.8,3.408) 55(-2.2,3.408) 56(-2.6,3.408)
  rect 4x4 smd paste-100 mask+0.051: 57(0,0)
  silkscreen extent -4.11,-3.58 3.58,3.58
r0402 [mm]
  rect 0.566x0.54 smd paste-100 mask+0.051: 1(-0.433,0) 2(0.433,0)
  silkscreen extent -0.94,-0.5 0.94,0.5
R0402 [mm]
  rect 0.566x0.54 smd paste-100 mask+0.051: 1(-0.433,0) 2(0.433,0)
  silkscreen extent -0.94,-0.5 0.94,0.5
SMA_L4.3-W2.6-LS5.1-R-RD [mm]
  rect 2x2 smd paste+0.051: 1(2.2,0) 2(-2.2,0)
  silkscreen extent -2.98,-1.5 2.6,1.5
SOT-23-3_L2.9-W1.3-P1.90-LS2.4-BR [mm]
  rect 1.25x0.7 smd paste+0 mask+0.051: 1(1,-0.95) 2(1,0.95) 3(-1,0)
  silkscreen extent -0.73,-1.53 0.73,1.53
SOT-23-3_L2.9-W1.6-P1.90-LS2.8-BR_1 [mm]
  rect 1.07x0.6 smd paste+0.051: 1(1.235,-0.95) 2(1.235,0.95) 3(-1.235,0)
  silkscreen extent -0.88,-1.54 0.88,1.54
SOT-23-5_L3.0-W1.7-P0.95-LS2.8-BL [mm]
  rect 0.49x1.157 smd paste+0.051: 1(-0.95,-1.154) 2(0,-1.154) 3(0.95,-1.154)
  rect 0.49x1.175 smd paste+0.051: 4(0.95,1.154) 5(-0.95,1.154)
  silkscreen extent -1.8,-1.29 1.53,0.85
USB-TYPEC-16P-SMD [mm]
  rrect50% 1.6x1.4 smd paste+0: 1(-5.2,2.845) 2(5.15,2.845)
  rrect50% 1.6x1.85 smd paste+0: 3(-5.2,-1.176) 4(5.15,-1.176)
  rect 0.3x1.3 smd paste+0.051: A1(-3.402,3.769) A4(-2.602,3.769) A5(-1.252,3.769) A6(-0.252,3.769) A7(0.248,3.769) A8(1.248,3.769) A9(2.598,3.769) A12(3.398,3.769) B1(3.098,3.769) B4(2.298,3.769) B5(1.748,3.769) B6(0.748,3.769) B7(-0.752,3.769) B8(-1.752,3.769) B9(-2.302,3.769) B12(-3.102,3.769)
  Keep-Out Layer circle w0.003: c-2.89,2.354 r0.35
  Keep-Out Layer circle w0.003: c2.89,2.354 r0.35
  Keep-Out Layer region: -3.24,2.354 -3.24,2.424 -3.187,2.552 -3.088,2.651 -2.96,2.704 -2.82,2.704 -2.692,2.651 -2.593,2.552 -2.54,2.424 -2.54,2.354 -2.54,2.284 -2.593,2.156 -2.692,2.057 -2.82,2.004 -2.96,2.004 -3.088,2.057 -3.187,2.156 -3.24,2.284 -3.24,2.354 -3.24,2.354
  Keep-Out Layer region: -3.24,2.354 -3.24,2.424 -3.187,2.552 -3.088,2.651 -2.96,2.704 -2.82,2.704 -2.692,2.651 -2.593,2.552 -2.54,2.424 -2.54,2.354 -2.54,2.284 -2.593,2.156 -2.692,2.057 -2.82,2.004 -2.96,2.004 -3.088,2.057 -3.187,2.156 -3.24,2.284 -3.24,2.354 -3.24,2.354
  Keep-Out Layer region: 2.54,2.354 2.54,2.424 2.593,2.552 2.692,2.651 2.82,2.704 2.96,2.704 3.088,2.651 3.187,2.552 3.24,2.424 3.24,2.354 3.24,2.284 3.187,2.156 3.088,2.057 2.96,2.004 2.82,2.004 2.692,2.057 2.593,2.156 2.54,2.284 2.54,2.354 2.54,2.354
  Keep-Out Layer region: 2.54,2.354 2.54,2.424 2.593,2.552 2.692,2.651 2.82,2.704 2.96,2.704 3.088,2.651 3.187,2.552 3.24,2.424 3.24,2.354 3.24,2.284 3.187,2.156 3.088,2.057 2.96,2.004 2.82,2.004 2.692,2.057 2.593,2.156 2.54,2.284 2.54,2.354 2.54,2.354
  silkscreen extent -4.33,-3.93 4.32,2.85
WSON-8_L8.0-W6.10-P1.27-BL-EP-MINI [mm]
  oval 0.56x1.4 smd paste+0.051: 1(-1.905,-4.027) 2(-0.635,-4.027) 3(0.635,-4.027) 4(1.905,-4.027) 5(1.905,4.027) 6(0.635,4.027) 7(-0.635,4.027) 8(-1.905,4.027)
  rect 4.3x3.4 smd paste+0.051: 9(0,0)
  silkscreen extent -3.08,-4.98 3.08,4.08

## Part data
AE1: library part ANT_5520
C1 C2: library part 10PF, Add into BOM=yes, Convert to PCB=yes, Device=10PF, FootprintName=C0603, ModelId=fca5be93b99f4b5a9a2fd372d58c31d9, ModelName=C0603, Symbol=10PF
  C1: Origin Footprint=C0603
C3 C4 C10: library part CGA0603X7R104K500JT, "容值:100nF;精度:±10%;额定电压:50V;材质(温度系数):X7R;", LCSC Part Name="100nF ±10% 50V", Manufacturer=HRE(芯声), Temperature Coefficient=X7R, Tolerance=±10%, Voltage Rated=50V, AddInBom=yes, ConvertToPcb=yes, Device=CGA0603X7R104K500JT, FootprintName=C0603, ManufacturerPart=CGA0603X7R104K500JT, ModelId=ac125912035d415993ca9572d50418b1, ModelName=C0603_L1.6-W0.8-H0.8, ModelTransform=62.992,31.496,0,0,0,0,0,0,0, Supplier=LCSC, Supplier Footprint=0603, Symbol=CGA0603X7R104K500JT
  C4 C10: SupplierPart=C6119867
C5: library part CA45-B-10V-47uF-K, "容值:47uF;精度:±10%;额定电压:10V;等效串联电阻:2.4Ω@100kHz;", Equivalent Series Resistance(ESR)=2.4Ω@100kHz, JLCPCB Part Class="Extended Part", LCSC Part Name="47uF ±10% 10V", Manufacturer=CEC(振华新云), Operating Temperature=-55℃~+125℃, Rated Voltage=10V, Tolerance=±10%, 3D Model=b77bd53aeda446d2bdd09b0fdaf9418a, 3D Model Transform=145.669,110.236,0,0,0,0,0,0,0, Add into BOM=yes, Convert to PCB=yes, Datasheet=https://atta.szlcsc.com/upload/public/pdf/source/20171123/C136658_15114108124621137439.pdf, Device=CA45-B-10V-47uF-K, FootprintName=CASE-B_3528, Manufacturer Part=CA45-B-10V-47uF-K, ModelName=CASE-B_L3.5-W2.8-H1.9, Origin Footprint=CAP-SMD_L3.5-W2.8-R-RD, Supplier=LCSC, Supplier Footprint=CASE-B-3528, Supplier Part=C136658, Symbol=47uF
C6 C9 C17 C18: library part 100NF, Add into BOM=yes, Convert to PCB=yes, Device=100NF, FootprintName=C0603, ModelId=fca5be93b99f4b5a9a2fd372d58c31d9, ModelName=C0603, Origin Footprint=C0603, Symbol=100NF
C7 C11 C12: library part 1UF, Add into BOM=yes, Convert to PCB=yes, Device=1UF, FootprintName=C0603, ModelId=fca5be93b99f4b5a9a2fd372d58c31d9, ModelName=C0603, Origin Footprint=C0603, Symbol=1UF
C8: library part 10UF, Add into BOM=yes, Convert to PCB=yes, Device=10UF, FootprintName=C0603, ModelId=fca5be93b99f4b5a9a2fd372d58c31d9, ModelName=C0603, Origin Footprint=C0603, Symbol=10UF
C19 C20: library part CL21A106KAYNNNE_C15850, "容值:10uF;精度:±10%;额定电压:25V;材质(温度系数):X5R;", JLCPCB Part Class=基础库, LCSC Part Name="10uF ±10% 25V", Manufacturer=SAMSUNG(三星), Manufacturer Part=CL21A106KAYNNNE, Temperature Coefficient=X5R, Tolerance=±10%, Voltage Rated=25V, 3D Model=1ba041120af144c991958decab20d241, 3D Model Transform=78.74,51.181,0,0,0,0,0,0.0005,0, AddInBom=yes, ConvertToPcb=yes, Datasheet=https://atta.szlcsc.com/upload/public/pdf/source/20160103/1457707679302.pdf, Device=CL21A106KAYNNNE_C15850, FootprintName=C0805, ModelName=C0805_L2.0-W1.3-H1.3, Supplier=LCSC, Supplier Footprint=0805, Symbol=CL21A106KAYNNNE
C21: library part CC0603KRX7R9BB104, "容值:100nF;精度:±10%;额定电压:50V;材质(温度系数):X7R;", JLCPCB Part Class=基础库, LCSC Part Name="100nF ±10% 50V", Manufacturer=YAGEO(国巨), Temperature Coefficient=X7R, Tolerance=±10%, Voltage Rated=50V, 3D Model=ac125912035d415993ca9572d50418b1, 3D Model Transform=62.992,31.496,0,0,0,0,0,0,0, AddInBom=yes, ConvertToPcb=yes, Datasheet=https://atta.szlcsc.com/upload/public/pdf/source/20180910/C282072_33301C7F631E79921B82A8DAC6BCC5B3.pdf, Device=CC0603KRX7R9BB104, FootprintName=C0603, Manufacturer Part=CC0603KRX7R9BB104, ModelName=C0603_L1.6-W0.8-H0.8, Supplier=LCSC, Supplier Footprint=0603, Symbol=CC0603KRX7R9BB104
C22: library part CL05B104KO5NNNC, "容值:100nF;精度:±10%;额定电压:16V;温度系数:X7R;", JLCPCB Part Class="Basic Part", LCSC Part Name="100nF ±10% 16V", Manufacturer=SAMSUNG(三星), Temperature Coefficient=X7R, Tolerance=±10%, Voltage Rated=16V, 3D Model=36a51122f27c49738f86b3bfa98863e0, 3D Model Transform=39.37,19.685,0,0,0,0,0,0,0, Add into BOM=yes, Convert to PCB=yes, Datasheet=https://atta.szlcsc.com/upload/public/pdf/source/20160218/1457707763339.pdf, Device=CL05B104KO5NNNC, FootprintName=C0402_1, Manufacturer Part=CL05B104KO5NNNC, ModelName=C0402_L1.0-W0.5-H0.5, Supplier=LCSC, Supplier Footprint=0402, Supplier Part=C1525, Symbol=0.1uF, Voltage Rating=16V
D2: JLCPCB Part Class="Extended Part", Manufacturer=null, Add into BOM=yes, Convert to PCB=yes, Device=SS34_C9900020624, FootprintName=SMA_L4.3-W2.6-LS5.1-R-RD, ModelId=6890bb9641474820a71fce2135ca3aaa, ModelName=SMA_L4.3-W2.6-LS5.1-R-RD, Origin Footprint=SMA_L4.3-W2.6-LS5.1-R-RD, Supplier=LCSC, Supplier Part=C9900020624, Symbol=SS34_C9900020624
L3: library part Device_L, "Inductor", LCSC=C13595, AddInBom=yes, Attribute1=L6, Device=Device_L, FootprintName=Inductor_SMD:L_0402_1005Metric, ki_fp_filters="Choke_* *Coil* Inductor_* L_*", ki_keywords="inductor choke coil reactor magnetic", MNF PART NUMBER=C13595, Symbol=Device_L, UniqueId=01f5988480b85854, UserDocLink=~
LED1: Manufacturer=EVERLIGHT(台湾亿光), Manufacturer Part=19-217/GHC-YR1S2/3T, Add into BOM=yes, Convert to PCB=yes, Device=LED-0603_G, FootprintName=LED0603_GREEN, ModelId=8b5fcaf0229049f8a37a9c352bb0ca0a, ModelName=LED-0603_G, Origin Footprint=LED0603_GREEN, Supplier=LCSC, Supplier Part=C72043, Symbol=LED-0603_G
Q1: library part CJ3401_1, "类型:P沟道;漏源电压(Vdss):30V;连续漏极电流(Id):4.2A;功率(Pd):350mW;导通电阻(RDS(on)@Vgs,Id):65mΩ@10V,4.2A;", Continuous Drain Current (Id)=4.2A, Drain Source On Resistance (RDS(on)@Vgs,Id)=65mΩ@10V,4.2A, Drain Source Voltage (Vdss)=30V, Gate Threshold Voltage (Vgs(th)@Id)=1.3V@250uA, JLCPCB Part Class="Extended Part", LCSC Part Name="P沟道 30V 4.2A", Manufacturer=CJ(江苏长电/长晶), Manufacturer Part=CJ3401, Power Dissipation (Pd)=350mW, 3D Model=89cb27a44ab2466697082bb9fd73a7d0, 3D Model Transform=110.236,114.173,0,180,0,0,-0.005,0.0005,0, Add into BOM=yes, Convert to PCB=yes, Datasheet=https://atta.szlcsc.com/upload/public/pdf/source/20140815/1457707217656.pdf, Device=CJ3401_1, FootprintName=SOT-23-3_L2.9-W1.6-P1.90-LS2.8-BR_1, ModelName=SOT-23-3L_L2.9-W1.6-H1.1-LS2.8-P0.95, Origin Footprint=SOT-23-3_L2.9-W1.6-P1.90-LS2.8-BR, Supplier=LCSC, Supplier Footprint=SOT-23, Supplier Part=C13799, Symbol=CJ3401, Type=P沟道
Q3: library part SI2301CDS, JLCPCB Part Class="Extended Part", Manufacturer="TECH PUBLIC(台舟)", 3D Model=d777607a152f4f3aac9bb0d0c14ed6fd, 3D Model Transform=v2:[-39.37007874015748,4.821444091131312e-15,0,-4.821444091131312e-15,-39.37007874015748,0,0,0,39.37007874015748,0.001,-0.001,0], Add into BOM=yes, Convert to PCB=yes, Device=SI2301CDS, FootprintName=SOT-23-3_L2.9-W1.3-P1.90-LS2.4-BR, Manufacturer Part=SI2301CDS, ModelName=SOT-23-3P_L2.9-W1.3-H1.0-LS2.4-P0.95, Supplier=LCSC, Supplier Part=C2841446, Symbol=SI2301CDS
R3 R4 R22: library part 4.7K, 3D Model=6bd5cd867e9542ebae21caaf5d2d4c4d, 3D Model Transform=v2:[2.410722045565656e-15,39.37007874015748,0,-39.37007874015748,2.410722045565656e-15,0,0,0,39.37007874015748,0,0,0], Add into BOM=yes, Convert to PCB=yes, Device=4.7K, FootprintName=R0603, ModelName=R0603, Symbol=4.7K
R5: library part AC0805FR-0710KL, "电阻类型:厚膜电阻;阻值:10kΩ;精度:±1%;功率:125mW;", JLCPCB Part Class="Extended Part", LCSC Part Name="10kΩ ±1% 125mW", Manufacturer=YAGEO(国巨), Operating Temperature Range=-55℃~+155℃, Overload Voltage (Max)=150V, Power(Watts)=125mW, Resistance=10kΩ, Temperature Coefficient=±100ppm/℃, Tolerance=±1%, 3D Model=37a81e68749a4138bd2dfa6897b24b85, 3D Model Transform=78.74,51.181,0,0,0,0,0,-0.0005,0, Add into BOM=yes, Convert to PCB=yes, Datasheet=https://atta.szlcsc.com/upload/public/pdf/source/20171113/C140868_15105613027091115785.pdf, Device=AC0805FR-0710KL, FootprintName=R0603, Manufacturer Part=AC0805FR-0710KL, ModelName=R0805_L2.0-W1.3-H0.6, Origin Footprint=R0805, Supplier=LCSC, Supplier Footprint=0805, Supplier Part=C140868, Symbol=10K_1, Type=厚膜电阻
R6 R17 R18 R19: library part 0402WGF0000TCE, "阻值:0Ω;精度:±1%;功率:62.5mW;温度系数:±800ppm/℃;电阻类型:厚膜电阻;", JLCPCB Part Class="Basic Part", LCSC Part Name="0Ω ±1% 62.5mW 厚膜电阻", Manufacturer=UNI-ROYAL(厚声), Operating Temperature Range=-55℃~+155℃, Overload Voltage (Max)=50V, Power(Watts)=62.5mW, Temperature Coefficient=±800ppm/℃, Tolerance=±1%, AddInBom=yes, ConvertToPcb=yes, Datasheet=https://atta.szlcsc.com/upload/public/pdf/source/20200306/C422600_1E6D84923E4A46A82E41ADD87F860B5C.pdf, Device=0402WGF0000TCE, FootprintName=R0402, Manufacturer Part=0402WGF0000TCE, ModelId=671aefced39d4c318694bba8bd8efd39, ModelName=R0402_L1.0-W0.5-H0.5, ModelTransform=39.37,19.685,0,0,0,0,0,0.0005,0, Supplier=LCSC, Supplier Footprint=0402, Supplier Part=C17168, Symbol=0402WGF0000TCE, Type=厚膜电阻
R10: library part 0402WGF2400TCE, "阻值:240Ω;精度:±1%;功率:62.5mW;温度系数:±100ppm/℃;电阻类型:厚膜电阻;", JLCPCB Part Class="Extended Part", LCSC Part Name="240Ω ±1% 62.5mW 厚膜电阻", Manufacturer=UNI-ROYAL(厚声), Operating Temperature Range=-55℃~+155℃, Overload Voltage (Max)=50V, Power(Watts)=62.5mW, Temperature Coefficient=±100ppm/℃, Tolerance=±1%, AddInBom=yes, ConvertToPcb=yes, Datasheet=https://atta.szlcsc.com/upload/public/pdf/source/20200306/C422600_1E6D84923E4A46A82E41ADD87F860B5C.pdf, Device=0402WGF2400TCE, FootprintName=R0402, Manufacturer Part=0402WGF2400TCE, ModelId=671aefced39d4c318694bba8bd8efd39, ModelName=R0402_L1.0-W0.5-H0.5, ModelTransform=39.37,19.685,0,0,0,0,0,0.0005,0, Supplier=LCSC, Supplier Footprint=0402, Supplier Part=C25094, Symbol=0402WGF2400TCE, Type=厚膜电阻
R16: library part 0603WAF1002T5E, "电阻类型:厚膜电阻;阻值:10kΩ;精度:±1%;功率:100mW;工作电压:75V;温度系数:±100ppm/℃;", JLCPCB Part Class="Basic Part", LCSC Part Name="厚膜电阻 10kΩ ±1% 100mW", Manufacturer=UNI-ROYAL(厚声), Operating Temperature=-55℃~+155℃, Power(Watts)=100mW, Temperature Coefficient=±100ppm/℃, Tolerance=±1%, Voltage-Supply(Max)=75V, 3D Model=fc143cca1e79419f9cd78b61e9279f08, 3D Model Transform=31.8897,63.7794,0,90,0,0,0,0,0, Add into BOM=yes, Convert to PCB=yes, Datasheet=https://item.szlcsc.com/datasheet/0603WAF1002T5E/26547.html, Device=0603WAF1002T5E, FootprintName=R0603, Manufacturer Part=0603WAF1002T5E, ModelName=R0603, Supplier=LCSC, Supplier Footprint=0603, Supplier Part=C25804, Symbol=0603WAF1002T5E, Type=厚膜电阻
R20: library part 0402WGF1003TCE, "电阻类型:厚膜电阻;阻值:100kΩ;精度:±1%;功率:62.5mW;工作电压:50V;温度系数:±100ppm/℃;", JLCPCB Part Class=基础库, LCSC Part Name="100kΩ ±1% 62.5mW", Manufacturer=UNI-ROYAL(厚声), Operating Temperature=-55℃~+155℃, Overload Voltage (Max)=50V, Power(Watts)=62.5mW, Temperature Coefficient=±100ppm/℃, Tolerance=±1%, 3D Model=671aefced39d4c318694bba8bd8efd39, 3D Model Transform=39.37,19.685,0,0,0,0,0,0.0005,0, Add into BOM=yes, Convert to PCB=yes, Datasheet=https://atta.szlcsc.com/upload/public/pdf/source/20200306/C422600_1E6D84923E4A46A82E41ADD87F860B5C.pdf, Device=0402WGF1003TCE, FootprintName=R0402_1, Manufacturer Part=0402WGF1003TCE, ModelName=R0402_L1.0-W0.5-H0.5, Operating Temperature Range=-55℃~+155℃, Supplier=LCSC, Supplier Footprint=0402, Supplier Part=C25741, Symbol=100k, Type=厚膜电阻, Voltage-Supply(Max)=50V
R21: library part 0603WAF1001T5E, "电阻类型:厚膜电阻;阻值:1kΩ;精度:±1%;功率:100mW;工作电压:75V;温度系数:±100ppm/℃;", JLCPCB Part Class="Basic Part", LCSC Part Name="1kΩ ±1% 100mW 厚膜电阻", Manufacturer=UNI-ROYAL(厚声), Operating Temperature=-55℃~+155℃, Power(Watts)=100mW, Temperature Coefficient=±100ppm/℃, Tolerance=±1%, Voltage-Supply(Max)=75V, 3D Model=fc143cca1e79419f9cd78b61e9279f08, 3D Model Transform=31.8897,63.7794,0,90,0,0,0,0,0, Add into BOM=yes, Convert to PCB=yes, Datasheet=https://item.szlcsc.com/datasheet/0603WAF1001T5E/21904.html, Device=0603WAF1001T5E, FootprintName=R0603, Manufacturer Part=0603WAF1001T5E, ModelName=R0603, Supplier=LCSC, Supplier Footprint=0603, Supplier Part=C21190, Symbol=0603WAF1001T5E, Type=厚膜电阻
U1 U2 U3 U4 U5 U6 U7 U8 U9 U10 U11 U12 U13 U14 U15 U16 U17 U18 U19 U20 U21 U22 U23 U24 U25 U26 U27 U28 U29 U30 U31 U32 U33 U34 U35 U36 U37 U38 U39 U40 U41 U42 U43 U44 U45 U46 U47 U48 U49 U50 U51 U52 U53 U54 U55 U56 U57 U58 U59 U60 U61 U62 U63 U64 U65 U66 U67 U68 U69 U70 U71 U72 U73 U74 U75 U76 U77 U78 U79 U80 U81 U82 U83 U84 U85 U86 U87 U88 U89 U90 U91 U92 U93 U94 U95 U96 U97 U98 U99 U100 U101 U102 U103 U104 U105 U106 U107 U108 U109 U110 U111 U112 U113 U114 U115 U116 U117 U118 U119 U120 U121 U122 U123 U124 U125 U126 U127 U128 U129 U130 U131 U132 U133 U134 U135 U136: "0404幻彩透明  内置驱动IC    WS2812B", ESD Withstand Voltage=2000V, Fixed-Frequency Pwm Mode=1kHz, JLCPCB Part Class="Extended Part", LCSC Part Name=XL-1010RGBC-WS2812B, Lens Color=无色透明透镜, Manufacturer=XINGLIGHT(成兴光), Operating Temperature=-20℃~+85℃, Quiescent Current=0.35mA, Voltage - Supply=4.5V~5.5V, AddInBom=yes, ConvertToPcb=yes, Data Transmission Rate=800Kbit/s, Datasheet=https://item.szlcsc.com/datasheet/XL-1010RGBC-2812B/6136402.html, Device=XL-1010RGBC-2812B, FootprintName=LED-SMD_4P-L1.0-W1.0-TL_XL-1010RGBC-WS2812B, Height=1mm, Installation method=正贴, Length=1mm, Luminous Intensity=300mcd；800mcd；200mcd, ManufacturerPart=XL-1010RGBC-2812B, ModelId=b6fa6106de37409d87b62d9524377e1c聨0819f05c4eef4c71ace90d822a990e87, ModelName=LED-SMD_4P-L1.0-W1.0-TL_XL-1010RGBC-WS2812B, ModelTransform=39.37,39.40937,0,0,0,0,0,0,0, Peak Wavelength=R:625nm；B:470nm；G:525nm, Supplier=LCSC, Supplier Footprint=SMD,1x1mm, SupplierPart=C5349953, Symbol=XL-1010RGBC-WS2812B, Viewing Angle=120°, Wavelength=620nm~625nm；465nm~475nm；520nm~530nm, Width=0.8mm
U137: "方向:全指向;信噪比:64dB;灵敏度:-26dB;阻抗:-;", Current Consumption=750uA, JLCPCB Part Class="Extended Part", Manufacturer=MEMS(敏芯微), Supply Voltage=1.8V, 3D Model=76b3790cc1704d2883f926567aae47b1, 3D Model Transform=106.299,137.795,0,0,0,0,0,0,0, Add into BOM=yes, Convert to PCB=yes, Datasheet=https://atta.szlcsc.com/upload/public/pdf/source/20210104/C966933_3269232C81BB891E12095FC7E88FC637.pdf, Device=MSM261S3526Z0CM, Direction=全指向, FootprintName=MIC-SMD_6P-L3.5-W2.7-P0.90-TR, Impedance=-, LCSC Part Name=MSM261S3526Z0CM, Manufacturer Part=MSM261S3526Z0CM, ModelName=MIC-SMD_6P-L3.5-W2.7-P0.90-TR, Sensitivity=-26dB, SNR(Signal to Noise Ratio)=64dB, Supplier=LCSC, Supplier Footprint=LGA-6(2.7x3.5), Supplier Part=C966933, Symbol=MSM261S3526Z0CM_1
U139: "轴向:X,Y,Z;", JLCPCB Part Class=扩展库, Manufacturer=ST(意法半导体), Operating Temperature=-40℃~+85℃, Supply Voltage=1.71V~3.6V, AddInBom=yes, Axial Direction=X,Y,Z, ConvertToPcb=yes, Datasheet=https://atta.szlcsc.com/upload/public/pdf/source/20170502/1493709336456.pdf, Device=LIS3DHTR, FootprintName=LGA-16_L3.0-W3.0-P0.50-TL, LCSC Part Name=LIS3DHTR, ManufacturerPart=LIS3DHTR, ModelId=9ae441d1842848bda5fda48efd45bd94, ModelName=LGA-16_L3.0-W3.0-P0.50-TL, ModelTransform=118.11,118.11,0,0,0,0,0,0,0, Supplier=LCSC, Supplier Footprint=LGA-16(3x3), SupplierPart=C15134, Symbol=LIS3DHTR_C15134
U140: "频率范围:2.412GHz~2.484GHz;接口类型:I2C；I2S；UART；USB；SPI;应用领域:蓝牙；IoT；WiFi;数据速率:150Mbps;灵敏度:-74.2dBm;典型应用频率:2.4GHz;", Current Of Transmitting=283mA, Frequency Range=2.412GHz~2.484GHz, JLCPCB Part Class="Extended Part", LCSC Part Name="2.4GHz Wi-Fi + 低功耗蓝牙系统级芯片（SoC）", Manufacturer=ESPRESSIF(乐鑫), Operating Temperature=-40℃~+65℃, Output Power=18.5dBm, Receive Current=88mA, Typical Application Frequency=2.4GHz, Voltage - Supply=3V~3.6V, 3D Model=105b388c0c03439aa7dbf35dd2b762a6, 3D Model Transform=275.59,275.59,0,0,0,0,0,0,0, Add into BOM=yes, Applications=蓝牙；IoT；WiFi, Convert to PCB=yes, Data Rate=150Mbps, Datasheet=https://item.szlcsc.com/datasheet/ESP32-S3R8/3198292.html, Device=ESP32-S3R8, FootprintName=QFN-56_L7.0-W7.0-P0.40-TL-EP4.0, Interface=I2C；I2S；UART；USB；SPI, Manufacturer Part=ESP32-S3R8, ModelName=QFN-56_L7.0-W7.0-P0.40-TL-EP4.0, Sensitivity=-74.2dBm, Supplier=LCSC, Supplier Footprint=QFN-56(7x7), Supplier Part=C2913194, Symbol=ESP32-S3(R8), Type=收发器
U141: "输出类型:固定;输出极性:正;最大输入电压:5.5V;输出电压:3.3V;输出电流:500mA;电源纹波抑制比(PSRR):50dB@(10kHz);", Dropout Voltage=400mV@(500mA), JLCPCB Part Class=扩展库, LCSC Part Name="输入5.5V 输出3.3V 500mA", Manufacturer=RICHTEK(立锜), Maximum Input Voltage=5.5V, Operating Temperature=-40℃~+85℃, Output Current=500mA, Output Voltage=3.3V, Power Supply Rejection Ratio (PSRR)=50dB@(10kHz), Quiescent Current (Ground Current)=50uA, 3D Model=0a2a1b8f50944f73965918ad6e5fe167, 3D Model Transform=118.60433,114.173,0,90,0,0,0.0005,0.0005,0, AddInBom=yes, ConvertToPcb=yes, Datasheet=https://atta.szlcsc.com/upload/public/pdf/source/20150504/1457707282459.pdf, Device=RT9013-33GB, Feature=-, FootprintName=SOT-23-5_L3.0-W1.7-P0.95-LS2.8-BL, Manufacturer Part=RT9013-33GB, ModelName=SOT-23-5_L2.9-W1.6-H1.1-LS2.8-P0.95, Noise=-, Number of Outputs=1, Output Polarity=正, Output Type=固定, Supplier=LCSC, Supplier Footprint=SOT-23-5, Supplier Part=C47773, Symbol=RT9013-33GB
U142: library part W25Q256JVEIQ_MINI, "接口类型:SPI;存储容量:256Mbit;时钟频率(fc):133MHz;", Clock Frequency=133MHz, JLCPCB Part Class="Extended Part", LCSC Part Name="具备双/四SPI接口的3V、256Mbit 串行闪存", Manufacturer=Winbond(华邦), Operating Temperature=-40℃~+85℃, Voltage - Supply=2.7V~3.6V, AddInBom=yes, Block Erase Time(tBE)=120ms@(32KB), ConvertToPcb=yes, Data Retention - TDR (Year)=20年, Datasheet=https://item.szlcsc.com/datasheet/W25Q256JVEIQ/98730.html, Device=W25Q256JVEIQ_C97522, FootprintName=WSON-8_L8.0-W6.10-P1.27-BL-EP, Interface=SPI, ManufacturerPart=W25Q256JVEIQ, Memory Size=256Mbit, ModelId=43ef51fbc8554229856bf47998ce0c31聨0819f05c4eef4c71ace90d822a990e87, ModelName=WSON-8_L8.0-W6.0-H0.78-P1.27, ModelTransform=315.7474,236.22,0,90,0,0,0,0,0, Page Programming Time (Tpp)=700us, Program / Erase Cycles=100000次, Supplier=LCSC, Supplier Footprint=WSON-8-EP(6x8), SupplierPart=C97522, Symbol=W25Q256JVEIQTR
X1: JLCPCB Part Class="Extended Part", Manufacturer=JGHC(晶光华), Add into BOM=yes, Convert to PCB=yes, Device=40MHz, FootprintName=CRYSTAL-SMD_4P-L2.5-W2.0-BL, ModelId=d23e0abc26e54c15b6292fd5f43702fa, ModelName=CRYSTAL-SMD_4P-L2.5-W2.0-BL, Origin Footprint=CRYSTAL-SMD_4P-L2.5-W2.0-BL, Supplier=LCSC, Supplier Part=C555614, Symbol=40MHz
C23: Add into BOM=yes, Convert to PCB=yes, Device=1UF, FootprintName=C0603, ModelId=fca5be93b99f4b5a9a2fd372d58c31d9, ModelName=C0603, Origin Footprint=C0603, Symbol=1UF
L2: Add into BOM=yes, Convert to PCB=yes, Device=2nH, FootprintName=L0603, Origin Footprint=L0603, Symbol=2nH
L4: Add into BOM=yes, Convert to PCB=yes, Device=24nH, FootprintName=L0603, Origin Footprint=L0603, Symbol=24nH
R1 R2: Add into BOM=yes, Convert to PCB=yes, Device=10k, FootprintName=R0603, ModelId=fc143cca1e79419f9cd78b61e9279f08, ModelName=R0603, Origin Footprint=R0603, Symbol=10k
R11: 3D Model=6bd5cd867e9542ebae21caaf5d2d4c4d, 3D Model Transform=v2:[2.410722045565656e-15,39.37007874015748,0,-39.37007874015748,2.410722045565656e-15,0,0,0,39.37007874015748,0,0,0], Add into BOM=yes, Convert to PCB=yes, Device=22r, FootprintName=R0603, ModelName=R0603, Symbol=22r
R12 R13: Add into BOM=yes, Convert to PCB=yes, Device=5.1k, FootprintName=R0603, ModelId=fc143cca1e79419f9cd78b61e9279f08, ModelName=R0603, Origin Footprint=R0603, Symbol=5.1k
USB1: Add into BOM=yes, Convert to PCB=yes, Device=KH-TYPEC-16P, FootprintName=USB-TYPEC-16P, Origin Footprint=USB-TYPEC-16P-SMD, Symbol=KH-TYPEC-16P, 是否验证=是

## Free pads (board coordinates)
  oval 90x39.37 smd: 2(1485.65,52.9) 2(1485.65,113.15)
  rrect50% 70x31.5 smd: 3(1972.2,621)
  rrect50% 70x31.5 smd far side: 3(2094.2,620)
  rrect50% 31.5x31.5 smd: 4(1808.82,81.04) 4(1870.2,80)

## Via types
v1: diameter 20, hole 12, Top Layer to Bottom Layer, tented both sides, 96 vias
v2: diameter 18, hole 12, Top Layer to Bottom Layer, tented both sides, 13 vias
v3: diameter 24, hole 12, Top Layer to Bottom Layer, tented both sides, 13 vias

## Nets (pads, with @x,y where several pads share a name; then routed paths per layer and width w, separated by ;. In a path a pad name is that pad's centre, name@x,y a point inside that pad or via, vN(x,y) a via of type N, cw(c..) or ccw(c..) an arc to the next point about the centre after c; other vN are vias at no path point)
3.3V: C3.2 C4.2 C6.2 C7.2 C8.2 C9.2 C10.2 C17.2 C18.2 C20.2 C21.2 C22.2 L2.1 R1.2 R2.2 R3.2 R4.2 U137.1 U139.1 U139.7 U139.8 U139.14 U140.20 U140.46 U140.55 U140.56 U141.5 U142.3 U142.7 U142.8 | length 4209.9
  Top Layer w7: U140.20@268.43,570.74 268.87,571.18 268.87,574.1 268.97,574.21 268.97,596.18 C18.2@279.89,607.1 ; R2.2@591.01,505.82 591.01,484.69 598.16,477.54 602.7,477.54 609.85,470.38 609.85,424.16 R1.2@591.51,405.82
  Top Layer w10: C17.2@173.97,252.36 174.76,252.36 189.69,267.29 U140.46@189.69,293.28 190.5,294.09 190.5,310.93 196.94,317.37 324.17,317.37 330.61,310.93 330.61,294.09 U140.55@331.43,293.28 U140.56@347.17,293.28 347.17,286.25 352.6,280.82 v3(444.28,280.82) C6.2@447.43,280.82 ; U140.20@268.43,561.59 269.24,560.78 269.24,543.94 289.82,523.36 312.53,523.36 v2(313.82,522.07) ; C7.2@480.51,505.82 C8.2@480.51,455.82 C9.2@480.51,405.82 480.51,368.81 482.87,366.45 482.87,358.18 L2.1@480.51,355.82 480.97,355.82 v3(483.65,353.14) ; L2.1@483.65,365.66 495.17,377.18 525.96,377.18 532.11,371.03 562.9,371.03 579.06,387.19 579.06,394.38 R1.2@584.87,400.19 ; v1(775.94,486.28) 774.39,484.73 774.39,477.37 762.55,465.54 U141.5@762.55,452.05 762.55,438.57 767.2,433.92 799.24,433.92 800.66,432.5 869.75,432.5 884.25,447 U142.8@975.44,447 ; U142.7@975.44,497 U142.8@975.44,447 ; C10.2@981.46,370 981.46,370.79 975.44,376.81 U142.8@975.44,447 ; v1(1021,407.89) 1019.09,409.8 1019.09,419.89 991.98,447 U142.8@975.44,447 ; U139.14@1228.3,155.9 1228.3,169.78 1243.6,185.09 ; U139.7@1248,266.1 U139.8@1228.3,266.1 1228.3,231.81 1235.65,224.46 1235.65,206.55 1255.51,186.69 1270.49,186.69 1272.93,184.26 1285.39,171.79 1302.91,171.79 U139.1@1303.1,171.6 1342.74,171.6 1358.24,156.1 1366.37,156.1 1372,150.46 R3.2@1372,149.96 ; v1(1253,371) 1253.36,371 1270.86,388.5 1281.74,388.5 1331.12,437.88 1331.12,524.98 1309.1,547 U142.3@1292.56,547 ; C3.2@1255.62,90.16 C4.2@1302.46,90.16 U139.1@1302.46,171.14 ; R4.2@1372,234.96 1372,234.45 1377.63,228.83 1378.14,228.83 1393.63,213.33 1393.63,161.1 1383.44,150.9 ; C22.2@1578.58,326.91 1585.29,326.91 v1(1587.2,325) ; C22.2@1580.77,328 U137.1@1629.2,328
  Top Layer w11.81: R1.2@591.01,405.82 591.51,405.82 602.79,394.54 C20.2@722.36,394.54 ; C20.2@722.36,395.6 732.94,395.6 734,394.54 766.57,394.54 C21.2@771.57,399.54 ; U141.5@762.55,438.57 762.55,405.39 C21.2@767.64,400.31 ; C21.2@777.09,397.76 777.09,395.6 779.74,395.6 787.13,388.21 787.92,388.21 794.9,381.23 794.9,380.45 805.33,370.02 805.33,334.18 812.24,327.26 1008.46,327.26 1056.35,279.37 1215.03,279.37 1218.46,275.94 1227.89,275.94 1228.3,275.54 U139.8@1228.3,266.1
  PWR w10: v2(313.82,522.07) 315.35,520.54 321.79,520.54 323.36,518.97 429.16,518.97 437.18,527 503.23,527 519.14,511.08 594.26,511.08 627.31,478.03 746.3,478.03 753.4,485.14 774.8,485.14 v1(775.94,486.28) ; v3(444.28,280.82) 444.28,313.77 v3(483.65,353.14) ; v1(1021,407.89) 1022.89,406 1220.5,406 1253,373.5 v1(1253,371) ; v1(1255.2,187) 1454.97,187 1466.5,198.53 1583.43,198.53 1610.2,225.3 1610.2,302 v1(1587.2,325)